# EAGLE board staj2 (EAGLE 7.3.0)
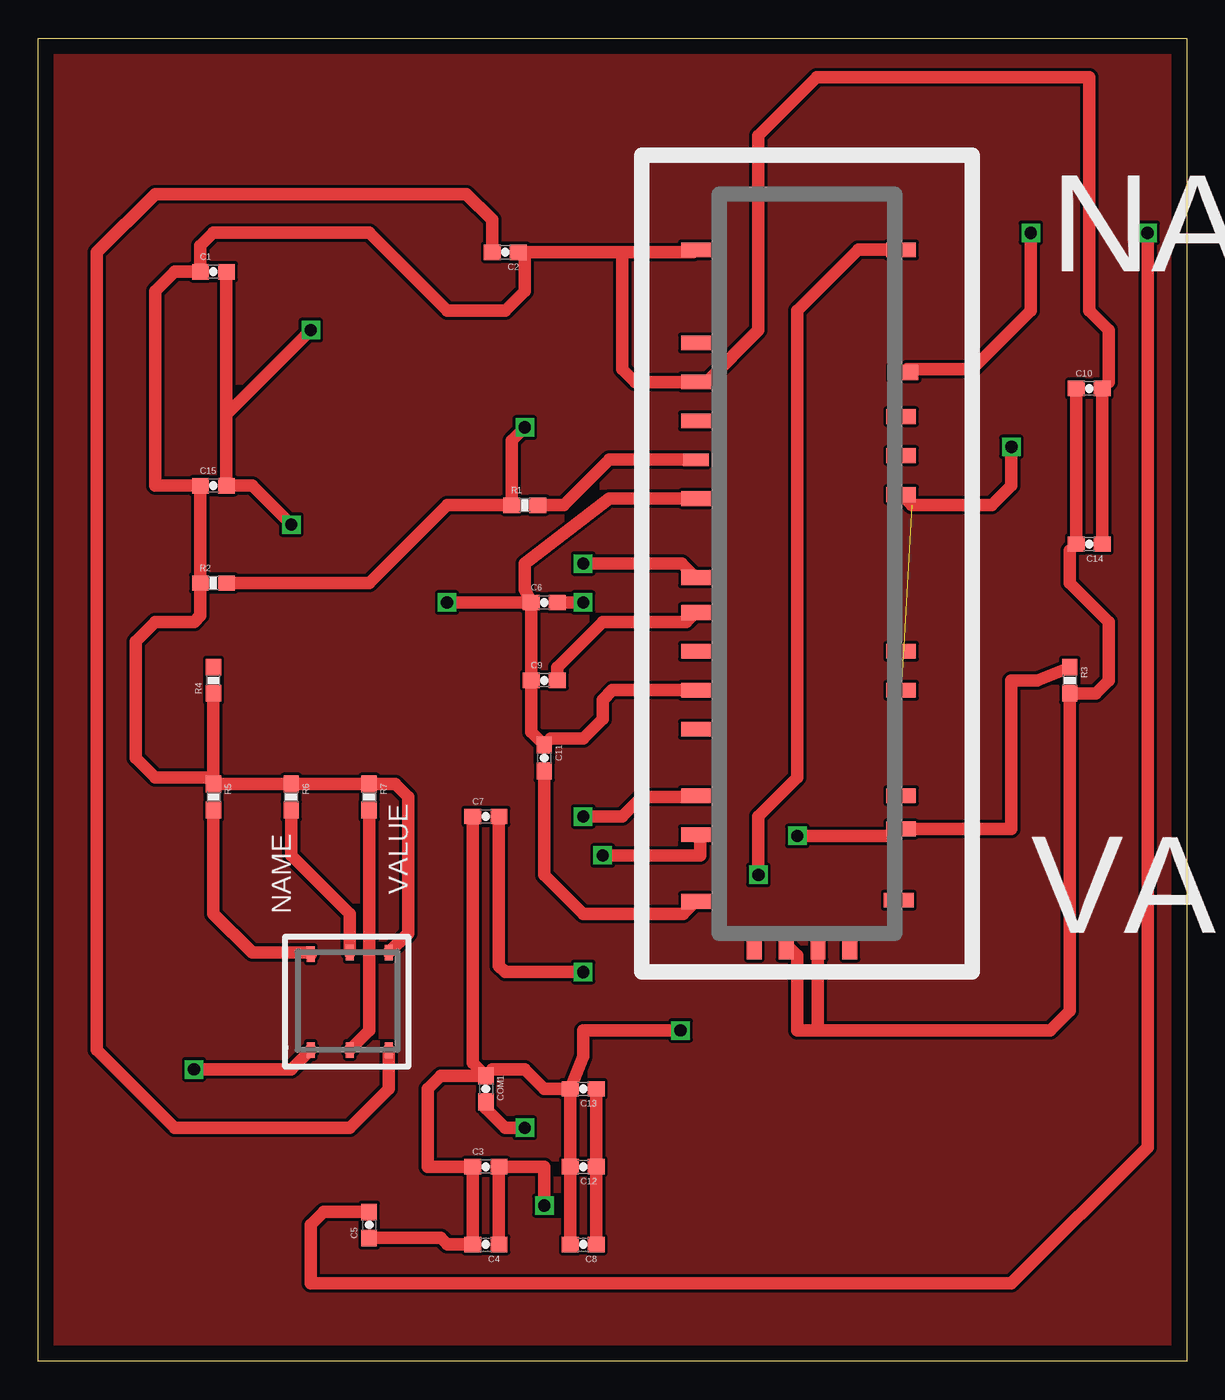
[diagram p0: board, top side]
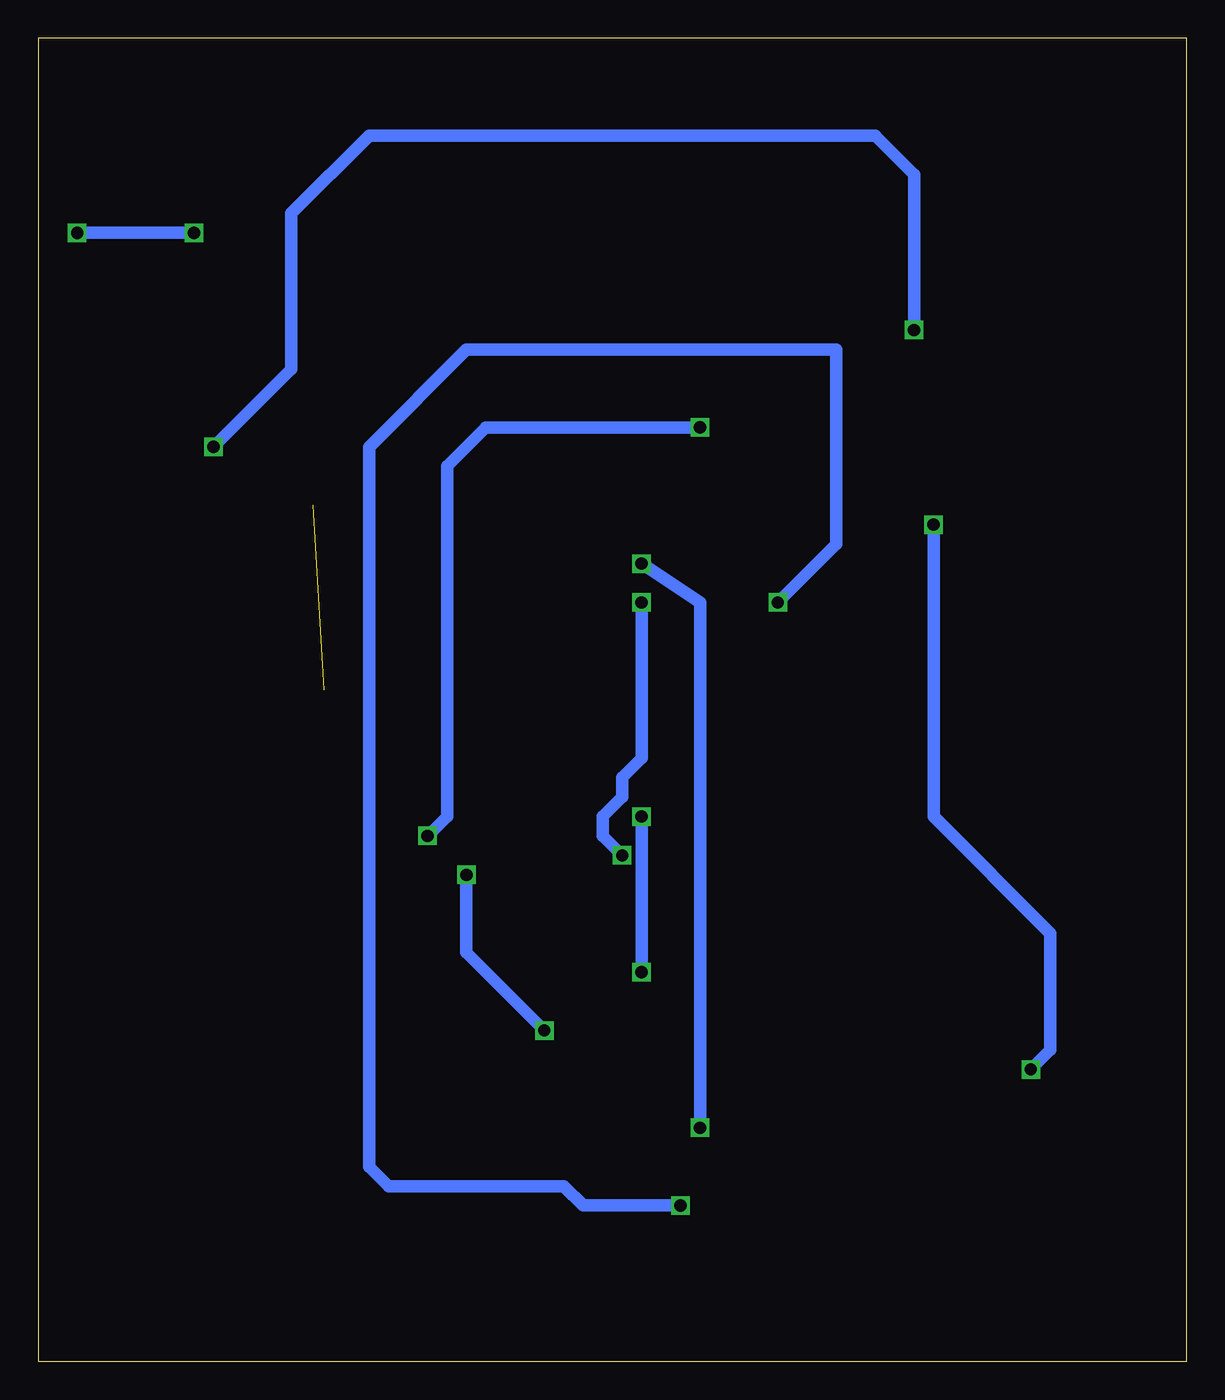
[diagram p1: board, bottom side, seen from below]

Size 74.93 x 86.36 mm. Coordinates in mm from the lower left corner, seen from the top.
Outline: 0,86.36 74.93,86.36 74.93,0 0,0 0,86.36
Copper layers (1*16): Top 0.035mm / dielectric 1.5mm / Bottom 0.035mm
Design rules "default": minimum track width 10mil, minimum drill 24mil, track to track 8mil, track to pad 8mil, pad to pad 8mil, via to via 8mil, smd to smd 8mil, copper to edge 40mil, drill to drill 8mil, minimum pad ring 10mil, minimum via ring 8mil, stop-mask expansion 4mil, vias tented up to drill 0mil, thermal gap 10mil

## Footprints (pad centres in the part's own frame; a part is rotated, then mirrored left to right if it is on the bottom)
0603-CAP = smd 1.1 x 1: 1 -0.85,0; 2 0.85,0
0603-RES = smd 1.1 x 1: 1 -0.85,0; 2 0.85,0
BQ51003 = smd 1.93 x 0.965: P$1 -17.35,33.18; P$2 -30.75,6.97; P$3 -30.75,4.43; P$4 -30.75,16.94; P$5 -30.75,33.18; P$6 -30.75,22.02; P$7 -17.19,25.17; P$9 -30.75,9.51; P$10 -30.75,1.89; P$11 -30.75,-2.46; P$12 -30.75,-5; P$13 -30.75,11.78; P$14 -30.75,-9.35; P$15 -30.75,24.56; P$16 -30.75,27.1; P$17 -17.35,-4.62; P$19 -17.35,22.29; P$20 -17.35,19.75; P$21 -17.35,17.21; P$25 -17.35,4.43; P$26 -17.35,6.97; P$27 -17.35,-2.46; P$28 -17.51,-9.27 | smd 1.676 x 0.813: P$18 -30.75,19.48 | smd 0.965 x 1.93: P$29 -26.94,-12.16; P$30 -24.86,-12.16; P$31 -22.78,-12.16; P$32 -20.7,-12.16
BQ25100 = smd 1.016 x 0.508: P$1 -12.7,6.35; P$2 -12.7,3.81; P$3 -12.7,1.27; P$4 -6.45,6.35; P$5 -6.35,3.81; P$6 -6.35,1.27

## Placement (x,y rotation side)
C1  0.1uF  [0603-CAP]  11.43,71.12 0 top
C2  1uF  [0603-CAP]  30.48,72.39 180 top
C3  100pF  [0603-CAP]  29.21,12.7 0 top
C4  1800pF  [0603-CAP]  29.21,7.62 180 top
C5  0.01uF  [0603-CAP]  21.59,8.89 90 top
C6  0.47uF  [0603-CAP]  33.02,49.53 0 top
C7  0.47uF  [0603-CAP]  29.21,35.56 0 top
C8  0.068uF  [0603-CAP]  35.56,7.62 180 top
C9  0.01uF  [0603-CAP]  33.02,44.45 0 top
C10  10uF  [0603-CAP]  68.58,63.5 0 top
C11  0.022uF  [0603-CAP]  33.02,39.37 270 top
C12  0.068uF  [0603-CAP]  35.56,12.7 180 top
C13  0.047uF  [0603-CAP]  35.56,17.78 180 top
C14  4.7uF  [0603-CAP]  68.58,53.34 180 top
C15  2.2uF  [0603-CAP]  11.43,57.15 0 top
COM1  0.022uF  [0603-CAP]  29.21,17.78 270 top
R1  845  [0603-RES]  31.75,55.88 0 top
R2  196  [0603-RES]  11.43,50.8 0 top
R3  20.0K  [0603-RES]  67.31,44.45 270 top
R4  10K  [0603-RES]  11.43,44.45 90 top
R5  10.0K  [0603-RES]  11.43,36.83 270 top
R6  10.0K  [0603-RES]  16.51,36.83 270 top
R7  1K  [0603-RES]  21.59,36.83 270 top
U$1  BQ51003  [BQ51003]  73.66,39.37 0 top
U$2  BQ25100  [BQ25100]  24.13,33.02 90 top

## Library data of the parts
C1-C15 COM1 = SparkFun-Capacitors; PROD_ID: CAP-00810
R1-R7 = SparkFun-Resistors; PROD_ID: RES-00824
U$1 = bq51003
U$2 = BQ25100

## Nets
AC1: C3.1 C4.2 C5.1 C7.1 C8.2 C12.2 C13.2 COM1.1 U$1.P$1
AC2: C3.2 C4.1 C6.1 C9.1 C11.1 U$1.P$3 U$1.P$4
AD-EN: U$1.P$6
BOOT1: C5.2 U$1.P$7
BOOT2: C9.2 U$1.P$9
CGH: U$1.P$10
CLMP1: C7.2 U$1.P$11
CLMP2: C6.2 U$1.P$12
COM1: COM1.2 U$1.P$13
COM2: C11.2 U$1.P$14
FOD: R1.1 R2.2 R3.1 U$1.P$17
GND: C1.1 C2.1 C10.2 C14.1 C15.1 R2.1 R4.1 R5.1 R6.1 R7.1 U$1.P$5 U$1.P$15 U$2.P$6
ILIM: R1.2 U$1.P$18
N$1: R7.2 U$2.P$2
N$2: R5.2 U$2.P$4
N$3: C8.1 C12.1 C13.1
N$7: R6.2 U$2.P$5
N$17: R4.2
OUT: C1.2 C15.2 U$1.P$21 U$1.P$25 U$2.P$1
OUT(BAT+): C2.2 U$2.P$3
RECT: C10.1 C14.2 R3.2 U$1.P$30 U$1.P$31

## Tracks (layer width: path | path; a pad name or v marks a point on that pad's centre or on a via)
AC1  (via drill 0.8)
  Top 0.813: C13.2 C12.2 C8.2 | C13.2 33.02,17.78 31.75,19.05 29.63,19.05 COM1.1 | COM1.1 26.25,18.63 25.4,17.78 25.4,12.7 C3.1 C4.2 26.67,7.62 26.25,8.04 C5.1 | C7.1 28.36,19.48 COM1.1 | U$1.P$1 53.5,72.55 49.53,68.58 49.53,38.1 46.99,35.56 v46.99,31.75 | v41.91,21.59 35.56,21.59 35.56,19.9 C13.2
  Bottom 0.813: v46.99,31.75 46.99,26.67 v41.91,21.59
AC2  (via drill 0.8)
  Top 0.813: C4.1 C3.2 33.02,12.7 v33.02,10.16 | U$1.P$3 37.45,43.8 36.83,43.18 36.83,41.91 35.56,40.64 33.44,40.64 C11.1 32.17,41.07 C9.1 C6.1 | U$1.P$4 37.26,56.31 31.75,52.07 31.75,50.38 C6.1 | v26.67,49.53 C6.1
  Bottom 0.813: v33.02,10.16 39.37,10.16 40.64,11.43 52.07,11.43 53.34,12.7 53.34,59.69 46.99,66.04 22.86,66.04 22.86,53.34 v26.67,49.53
BOOT1  (via drill 0.8)
  Top 0.813: C5.2 18.63,9.74 17.78,8.89 17.78,5.08 63.5,5.08 72.39,13.97 v72.39,73.66 | v64.77,73.66 64.77,68.58 60.96,64.77 56.7,64.77 U$1.P$7
  Bottom 0.813: v72.39,73.66 v64.77,73.66
BOOT2
  Top 0.813: C9.2 33.87,45.3 36.83,48.26 42.29,48.26 U$1.P$9
CLMP1  (via drill 0.8)
  Top 0.813: C7.2 30.06,25.82 30.48,25.4 v35.56,25.4 | v35.56,35.56 38.1,35.56 39.37,36.83 42.99,36.83 | 43.18,36.83 42.99,36.83 | 42.99,36.83 U$1.P$11
  Bottom 0.813: v35.56,25.4 v35.56,35.56
CLMP2  (via drill 0.8)
  Top 0.813: C6.2 v35.56,49.53 | v36.83,33.02 43.18,33.02 43.18,34.1 U$1.P$12
  Bottom 0.813: v35.56,49.53 35.56,39.37 36.83,38.1 36.83,36.83 38.1,35.56 38.1,34.29 v36.83,33.02
COM1  (via drill 0.8)
  Top 0.813: COM1.2 29.21,16.51 30.48,15.24 v31.75,15.24 | v35.56,52.07 41.99,52.07 U$1.P$13
  Bottom 0.813: v31.75,15.24 31.75,49.53 v35.56,52.07
COM2
  Top 0.813: C11.2 33.02,31.75 35.56,29.21 42.1,29.21 U$1.P$14
FOD  (via drill 0.8)
  Top 0.813: R3.1 65.19,44.45 63.5,44.45 63.5,34.75 U$1.P$17 55.85,34.29 v49.53,34.29 | R2.2 21.59,50.8 26.67,55.88 R1.1 30.9,60.11 v31.75,60.96
  Bottom 0.813: v31.75,60.96 45.72,60.96 48.26,58.42 48.26,35.56 v49.53,34.29
GND
  Top 0.813: C14.1 C10.2 69.85,63.92 69.85,67.31 68.58,68.58 68.58,83.82 50.8,83.82 46.99,80.01 46.99,67.31 43.61,63.93 U$1.P$15 38.94,63.93 38.1,64.77 38.1,72.39 | U$2.P$6 24.13,27.94 24.13,36.83 23.28,37.68 R7.1 R6.1 R5.1 | R5.1 11.01,38.1 7.62,38.1 6.35,39.37 6.35,46.99 7.62,48.26 10.16,48.26 10.58,48.68 R2.1 C15.1 7.62,57.15 7.62,69.85 8.89,71.12 C1.1 10.58,72.81 11.43,73.66 21.59,73.66 26.67,68.58 30.48,68.58 31.75,69.85 31.75,71.97 C2.1 38.1,72.39 | R4.1 R5.1 | 38.1,72.39 42.75,72.39 U$1.P$5
ILIM
  Top 0.813: U$1.P$18 37.26,58.85 34.29,55.88 R1.2
N$1
  Top 0.813: R7.2 21.59,21.59 U$2.P$2
N$2
  Top 0.813: R5.2 11.43,29.21 13.97,26.67 17.68,26.67 U$2.P$4
N$3
  Top 0.813: C13.1 C12.1 C8.1
N$4
  pour Top: 74.93,86.36 74.93,0 0,0 0,86.36
N$7
  Top 0.813: R6.2 16.51,33.02 20.32,29.21 U$2.P$5
OUT  (via drill 0.8)  (1 unrouted)
  Top 0.813: C1.2 C15.2 | C15.2 13.97,57.15 v16.51,54.61 | v10.16,19.05 16.51,19.05 U$2.P$1 | C15.2 12.28,61.81 v17.78,67.31 | v63.5,59.69 63.5,57.15 62.23,55.88 57.01,55.88 U$1.P$21
  Bottom 0.813: v16.51,54.61 16.51,35.56 8.89,27.94 8.89,20.32 v10.16,19.05 | v17.78,67.31 17.78,77.47 20.32,80.01 53.34,80.01 58.42,74.93 58.42,64.77 v63.5,59.69
OUT(BAT+)
  Top 0.813: C2.2 29.63,74.51 27.94,76.2 7.62,76.2 3.81,72.39 3.81,20.32 8.89,15.24 20.32,15.24 22.86,17.78 U$2.P$3
RECT
  Top 0.813: C10.1 C14.2 67.31,52.92 67.31,50.8 69.85,48.26 69.85,44.45 69,43.6 R3.2 67.31,22.86 66.04,21.59 50.8,21.59 | 50.8,21.59 49.53,21.59 49.53,26.48 U$1.P$30 | U$1.P$31 50.88,21.67 50.8,21.59